# Altium PCB Batarey.PcbDoc
Units mil, origin at the board's own origin, x right, y up, seen from the top; angles counter-clockwise.
Board outline 15135 x 4040 mil, 2 copper layers (Top Layer, Bottom Layer); 8 components, 137 nets, 38 pads, 0 vias.
Unrouted connection lines stored in the file: 33.
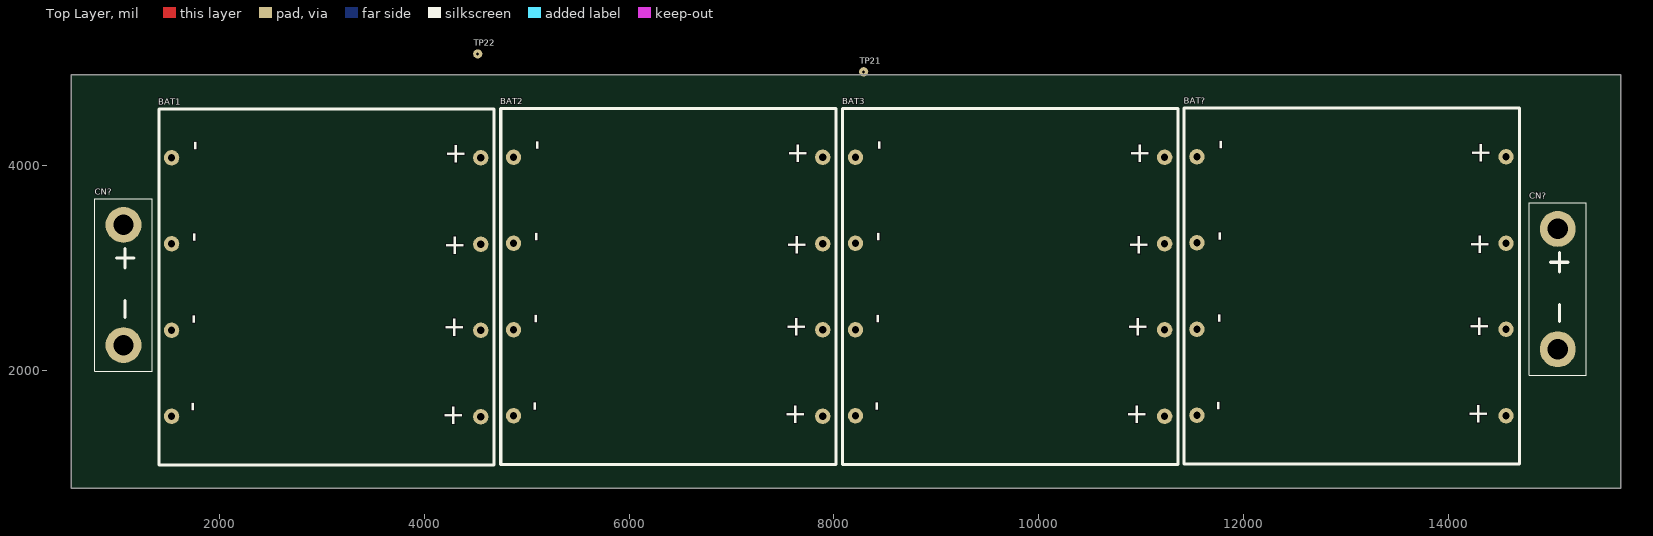
[diagram p0: Top Layer view]
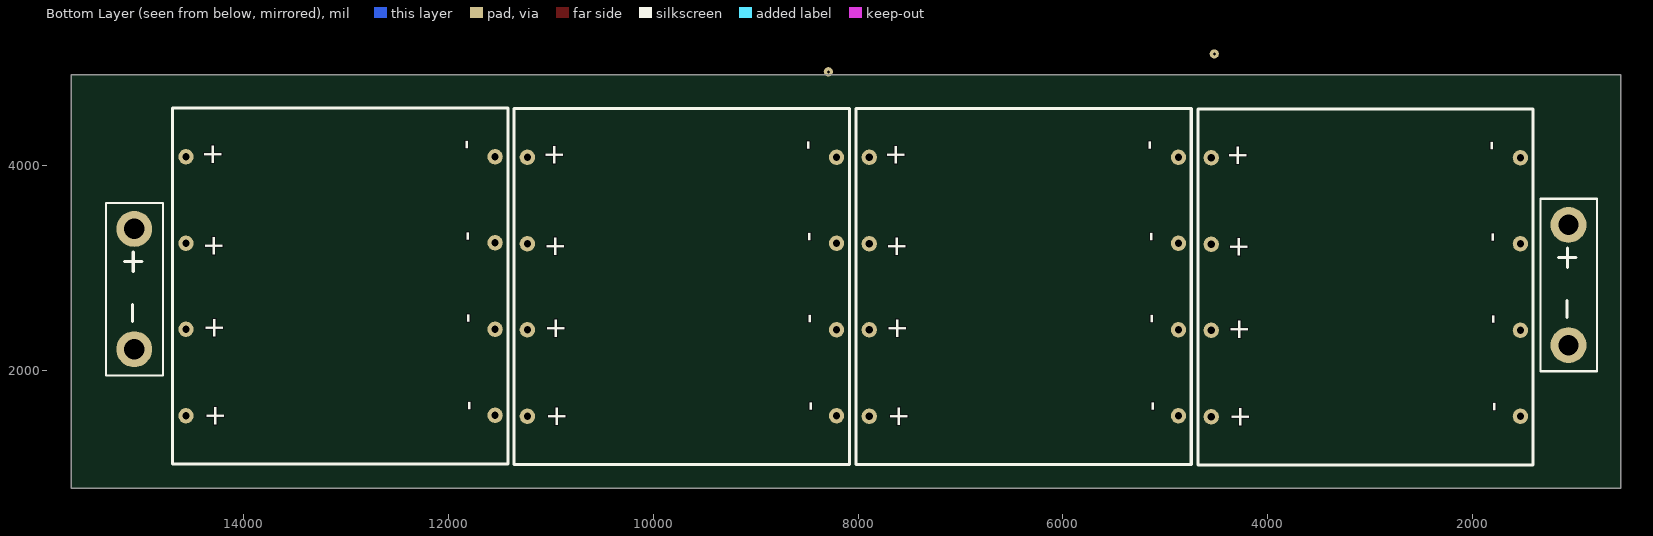
[diagram p1: Bottom Layer view, seen from below]

## Layer stack, top to bottom
Top Solder: solder mask 0.4, Solder Resist, Dk 3.5
Top Layer: signal copper 1.4
Dielectric 1: dielectric 12.6, FR-4, Dk 4.8
Bottom Layer: signal copper 1.4
Bottom Solder: solder mask 0.4, Solder Resist, Dk 3.5

## Board outline
550,845 550,4885 15685,4885 15685,845

## Design rules (kind name [scope] priority, off if disabled: settings)
Clearance [All] p1: gap=10 ignorepadtopadclearanceinfootprint=FALSE except(0: Arc-Hole Track-Hole SMDPad-Hole THPad-Hole Via-Hole Fill-Hole Poly-Hole Region-Hole Text-Hole)
PolygonConnect [All] p1: connectstyle=Relief reliefconductorwidth=10 reliefentries=4 polygonreliefangle="90 Angle" airgapwidth=10
RoomDefinition Batarey [InComponentClass('Batarey')] p1: confinementstyle=ConfineIn formatcopy=TRUE lockcomponents=FALSE outline 350,835 22055,835 22055,7170 350,7170
RoutingVias [All] p1: holewidth=28 width=50 viastyle="Through Hole" minholewidth=28 minwidth=50 maxholewidth=28 maxwidth=50
SolderMaskExpansion [All] p1: expansion=4 istentingtop=FALSE
Width [All] p1: maxlimit=500 minlimit=10 preferedwidth=10 minimp=50.000000 maximp=50.000000 favimp=50.000000
30 further rules are at their usual default settings.

## Classes and differential pairs
component class Batarey: BAT1 BAT2 BAT3 BAT? CN? TP21 TP22

## Components (designator, comment, footprint, x,y, rotation, side; value= is the part's Value field where it differs from the comment)
BAT1 "21700_Bat" 21700_BAT 3720,3610 r270 top
BAT2 "21700_Bat" 21700_BAT 7060,3615 r270 top
BAT3 "21700_Bat" 21700_BAT 10400,3615 r270 top
BAT? "21700_Bat" 21700_BAT 13735,3620 r270 top
CN? "BAT_CON" Batarey_connector 1080,3440 r270 top
CN? "BAT_CON" Batarey_connector 15090,3400 r270 top
TP21 "Test_Point_PCB" Test_Point 8290,4915 r90 top
TP22 "Test_Point_PCB" Test_Point 4520,5090 r90 top

## Footprints (in the part's own frame and the unit in brackets; to place one, negate y for a bottom-side part, rotate by r counter-clockwise, add the part's x,y. Pads: shape width x height; smd on the part's side, far side on the other; paste and mask are expansions set on the pad)
21700_BAT [mil]
  round 150 hole 70: 1(-465,830) 2(-465,-2190) 3(380,830) 4(375,-2190) 5(1220,830) 6(1220,-2190) 7(2065,830) 8(2060,-2190)
  silkscreen extent -940,-2315 2535,960, body extent -932,-2315 2532,953, height 858
Batarey_connector [mil]
  round 350 hole 200: 1(20,-20) 2(1195,-20)
  silkscreen extent -235,-300 1450,260
Test_Point [mil]
  round 90 hole 30 unplated paste+4 mask+4: 1(0,0)

## Part data
CN? CN?: "Batarey_connection"
TP21 TP22: library part TP_PCB?, "Test_Point"

## Nets (pads, with @x,y where several pads share a name; then routed paths per layer and width w, separated by ;. In a path a pad name is that pad's centre, name@x,y a point inside that pad or via, vN(x,y) a via of type N, cw(c..) or ccw(c..) an arc to the next point about the centre after c; other vN are vias at no path point)
3.3V: 
+3,3V: 
+5: 
+12: 
GND: 
Net*1_1: 
Net*1_7: 
Net*_1: 
Net*_7: 
NetB1_5: 
NetB1_6: 
NetB1_7: 
NetB2_5: 
NetB2_6: 
NetB2_7: 
NetB3_1: 
NetB3_5: 
NetB3_6: 
NetB3_7: 
NetB3_8: 
NetB4_1: 
NetB4_5: 
NetB4_6: 
NetB4_7: 
NetB4_8: 
NetBAT1_1: BAT1.1 BAT1.3 BAT1.5 BAT1.7 BAT2.2 BAT2.4 BAT2.6 BAT2.8 TP22.1
NetBAT1_2: BAT1.2 BAT1.4 BAT1.6 BAT1.8 CN?.2
NetBAT2_1: BAT2.1 BAT2.3 BAT2.5 BAT2.7 BAT3.2 BAT3.4 BAT3.6 BAT3.8 TP21.1
NetBAT3_1: BAT3.1 BAT3.3 BAT3.5 BAT3.7 BAT?.2 BAT?.4 BAT?.6 BAT?.8
NetBAT?_1: BAT?.1 BAT?.3 BAT?.5 BAT?.7 CN?.1
NetBT1_2: 
NetBUZ1_1: 
NetBUZ1_2: 
NetC1_1: 
NetC1_2: 
NetC2_1: 
NetC2_2: 
NetC3_1: 
NetC3_2: 
NetC4_2: 
NetC6_1: 
NetC7_2: 
NetC9_1: 
NetC10_2: 
NetC11_1: 
NetC12_2: 
NetC13_1: 
NetC14_2: 
NetC15_1: 
NetC15_2: 
NetC17_1: 
NetC17_2: 
NetC18_2: 
NetC?_1: 
NetC?_2: 
NetD1_1: 
NetD3_1: 
NetD3_2: 
NetD4_1: 
NetD?_1: 
NetD?_2: 
NetIC2_1: 
NetJ3_2: 
NetJ3_3: 
NetJ3_4: 
NetJ3_5: 
NetJ5_1: 
NetJ5_3: 
NetLCD1_2: 
NetLCD1_3: 
NetLCD1_4: 
NetLCD1_6: 
NetLCD1_7: 
NetLCD1_8: 
NetLCD1_9: 
NetLCD1_10: 
NetLCD1_16: 
NetLED1_1: 
NetLED2_1: 
NetLED3_1: 
NetLED4_1: 
NetQ1_1: 
NetQ1_3: 
NetQ2_1: 
NetQ4_1: 
NetQ4_3: 
NetQ6_1: 
NetQ7_1: 
NetQ8_1: 
NetQ9_1: 
NetQ10_1: 
NetQ10_2: 
NetQ11_3: 
NetQ12_1: 
NetQ12_3: 
NetQ13_1: 
NetQ13_2: 
NetQ14_1: 
NetQ15_1: 
NetQ16_1: 
NetQ17_1: 
NetQ20_1: 
NetQ22_1: 
NetQ23_1: 
NetQ?_1: 
NetR3_2: 
NetR5_2: 
NetR8_1: 
NetR14_2: 
NetR15_2: 
NetR16_2: 
NetR18_1: 
NetR18_2: 
NetR19_2: 
NetR23_1: 
NetR24_1: 
NetR24_2: 
NetR25_2: 
NetR29_2: 
NetR36_1: 
NetR37_1: 
NetR38_1: 
NetR41_1: 
NetR46_1: 
NetR46_2: 
NetR54_1: 
NetR56_1: 
NetR56_2: 
NetR?_1: 
NetR?_2: 
NetT1_6: 
NetU2_14: 
NetU4_14: 
NetU5_1: 
NetU5_15: 
"VCC +320": 
Vref: 

## Silkscreen, mask and mechanical layers (free items; w line width, h text height)
Mechanical 1:
  the board outline again, w10

## Dimensions
550,4885 to 550,845 on Top Layer
550,4885 to 15685,4885 on Top Layer

## Text inside footprints (layer, text, board x,y; h text height)
BAT1: Top Overlay "-" at 1665.03,1690 h200 r270; Top Overlay "-" at 1675.03,2545 h200 r270; Top Overlay "-" at 1680.03,3350 h200 r270; Top Overlay "-" at 1690.03,4240 h200 r270; Top Overlay "+" at 4196.68,1675 h200 r270; Top Overlay "+" at 4206.68,2530 h200 r270; Top Overlay "+" at 4211.68,3335 h200 r270; Top Overlay "+" at 4221.68,4225 h200 r270; Bottom Overlay "-" at 1705.03,1690 h200 r270; Bottom Overlay "-" at 1720.03,3350 h200 r270; Bottom Overlay "-" at 1730.03,4240 h200 r270; Bottom Overlay "-" at 1715.03,2545 h200 r270; Bottom Overlay "+" at 4176.68,1660 h200 r270; Bottom Overlay "+" at 4186.68,2515 h200 r270; Bottom Overlay "+" at 4201.68,4210 h200 r270; Bottom Overlay "+" at 4191.68,3320 h200 r270
BAT2: Top Overlay "-" at 5005.03,1695 h200 r270; Top Overlay "-" at 5015.03,2550 h200 r270; Top Overlay "-" at 5020.03,3355 h200 r270; Top Overlay "-" at 5030.03,4245 h200 r270; Top Overlay "+" at 7536.68,1680 h200 r270; Top Overlay "+" at 7546.68,2535 h200 r270; Top Overlay "+" at 7551.68,3340 h200 r270; Top Overlay "+" at 7561.68,4230 h200 r270; Bottom Overlay "-" at 5045.03,1695 h200 r270; Bottom Overlay "-" at 5060.03,3355 h200 r270; Bottom Overlay "-" at 5070.03,4245 h200 r270; Bottom Overlay "-" at 5055.03,2550 h200 r270; Bottom Overlay "+" at 7516.68,1665 h200 r270; Bottom Overlay "+" at 7526.68,2520 h200 r270; Bottom Overlay "+" at 7541.68,4215 h200 r270; Bottom Overlay "+" at 7531.68,3325 h200 r270
BAT3: Top Overlay "-" at 8345.03,1695 h200 r270; Top Overlay "-" at 8355.03,2550 h200 r270; Top Overlay "-" at 8360.03,3355 h200 r270; Top Overlay "-" at 8370.03,4245 h200 r270; Top Overlay "+" at 10876.68,1680 h200 r270; Top Overlay "+" at 10886.68,2535 h200 r270; Top Overlay "+" at 10891.68,3340 h200 r270; Top Overlay "+" at 10901.68,4230 h200 r270; Bottom Overlay "-" at 8385.03,1695 h200 r270; Bottom Overlay "-" at 8400.03,3355 h200 r270; Bottom Overlay "-" at 8410.03,4245 h200 r270; Bottom Overlay "-" at 8395.03,2550 h200 r270; Bottom Overlay "+" at 10856.68,1665 h200 r270; Bottom Overlay "+" at 10866.68,2520 h200 r270; Bottom Overlay "+" at 10881.68,4215 h200 r270; Bottom Overlay "+" at 10871.68,3325 h200 r270
BAT?: Top Overlay "-" at 11680.03,1700 h200 r270; Top Overlay "-" at 11690.03,2555 h200 r270; Top Overlay "-" at 11695.03,3360 h200 r270; Top Overlay "-" at 11705.03,4250 h200 r270; Top Overlay "+" at 14211.68,1685 h200 r270; Top Overlay "+" at 14221.68,2540 h200 r270; Top Overlay "+" at 14226.68,3345 h200 r270; Top Overlay "+" at 14236.68,4235 h200 r270; Bottom Overlay "-" at 11720.03,1700 h200 r270; Bottom Overlay "-" at 11735.03,3360 h200 r270; Bottom Overlay "-" at 11745.03,4250 h200 r270; Bottom Overlay "-" at 11730.03,2555 h200 r270; Bottom Overlay "+" at 14191.68,1670 h200 r270; Bottom Overlay "+" at 14201.68,2525 h200 r270; Bottom Overlay "+" at 14216.68,4220 h200 r270; Bottom Overlay "+" at 14206.68,3330 h200 r270